# Allegro board SATROT-2-POWERBOARD-5.brd
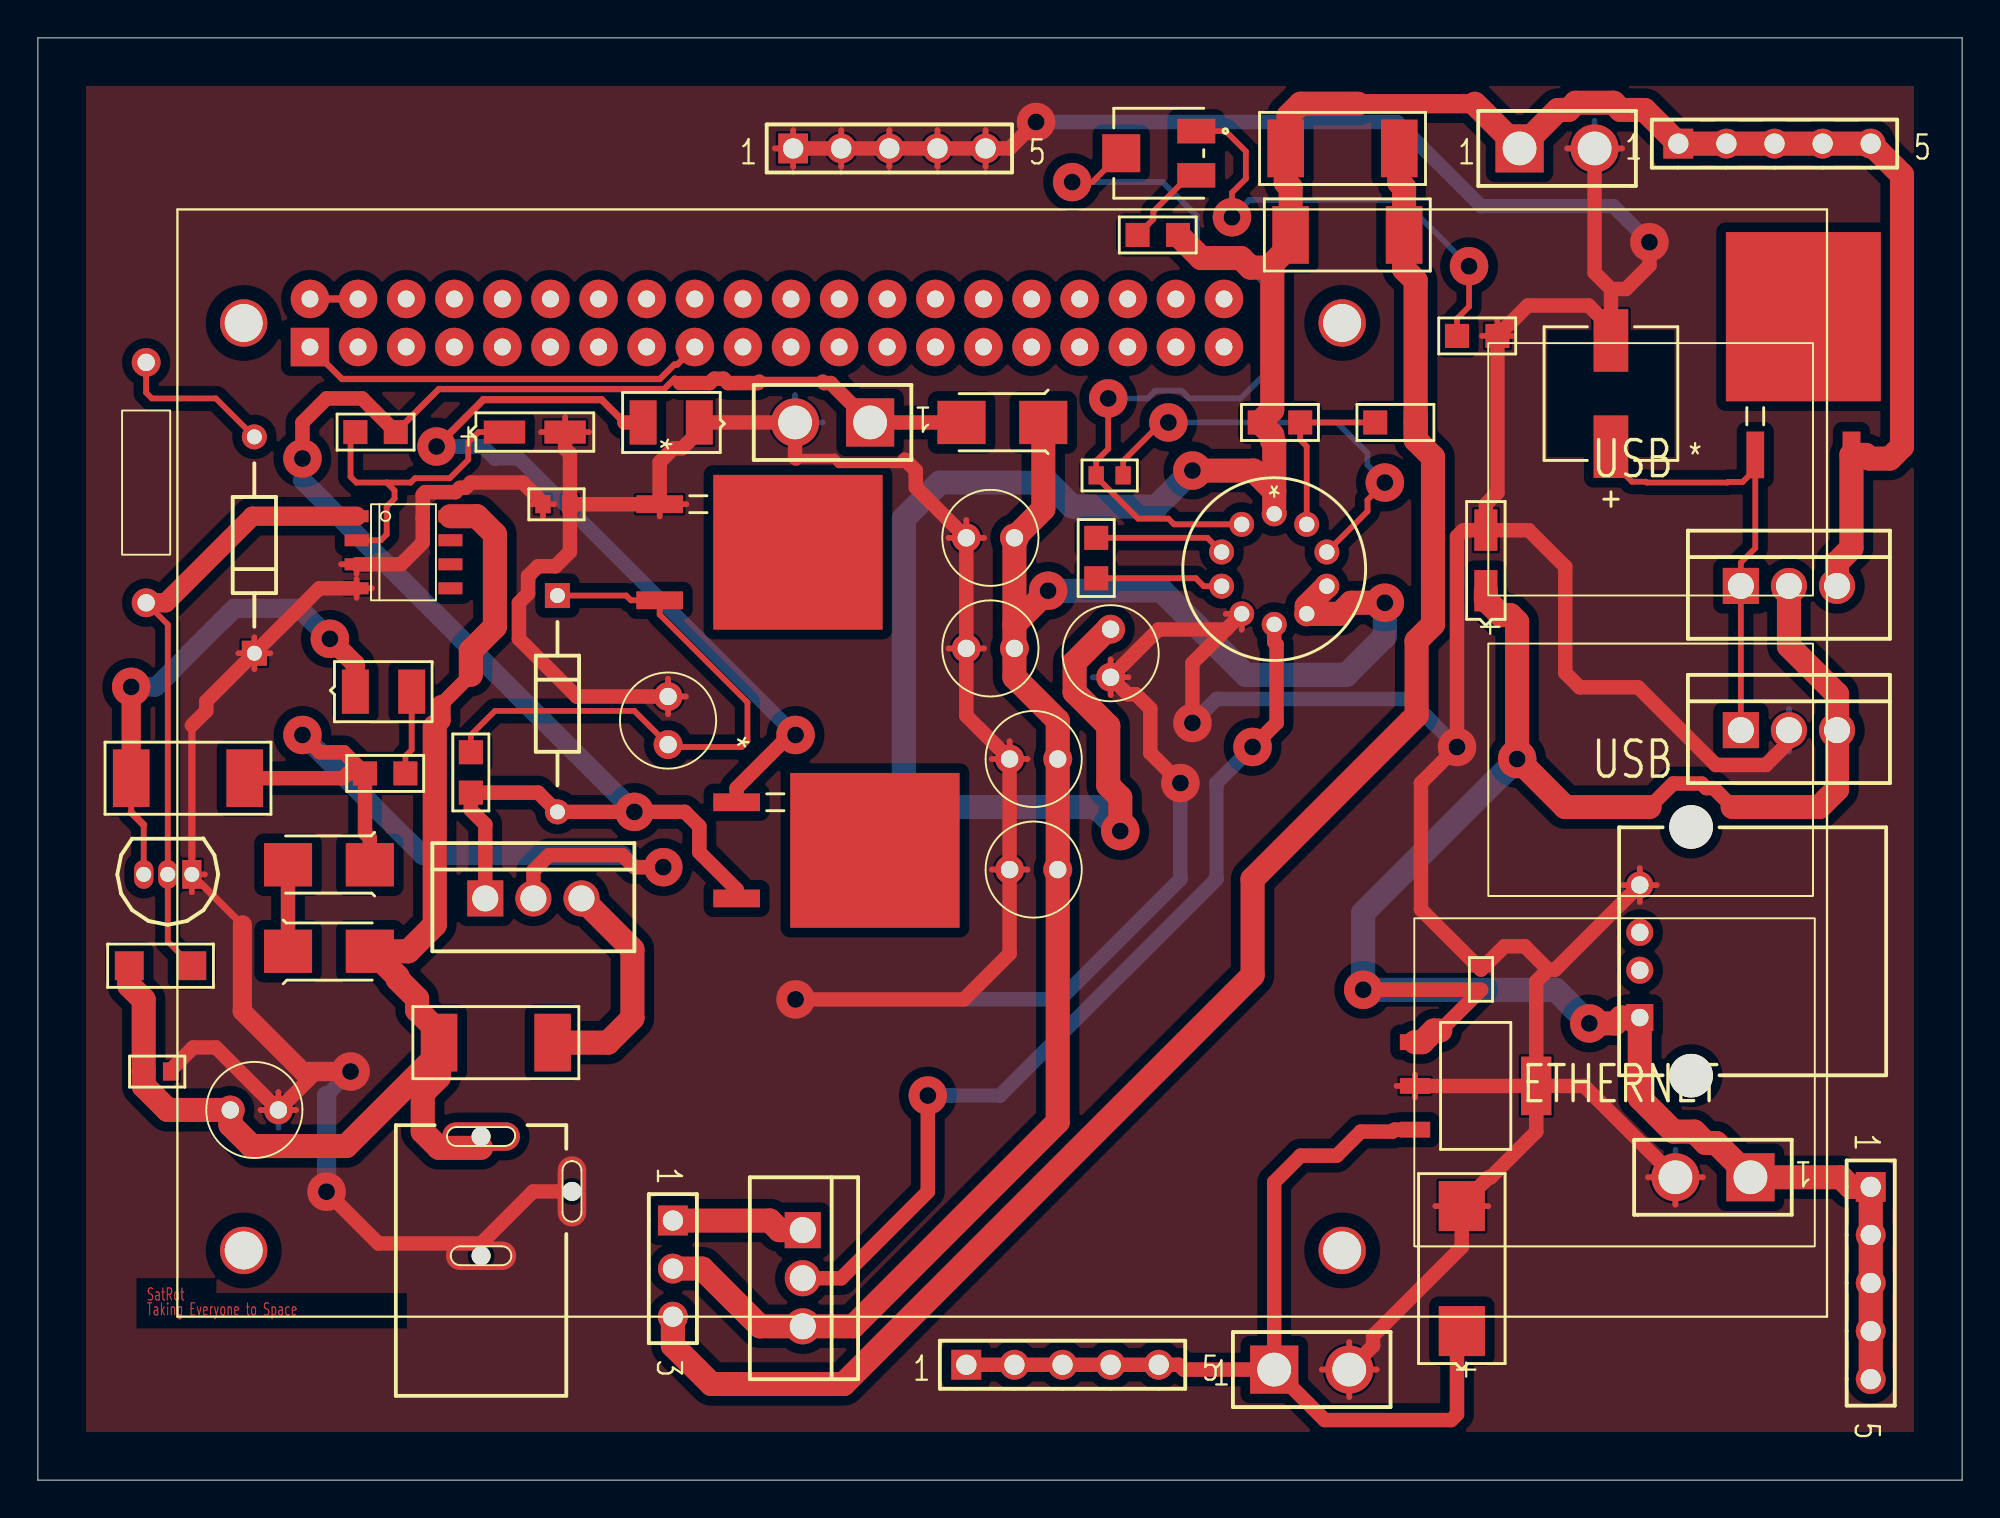
[diagram p0: board, top side]
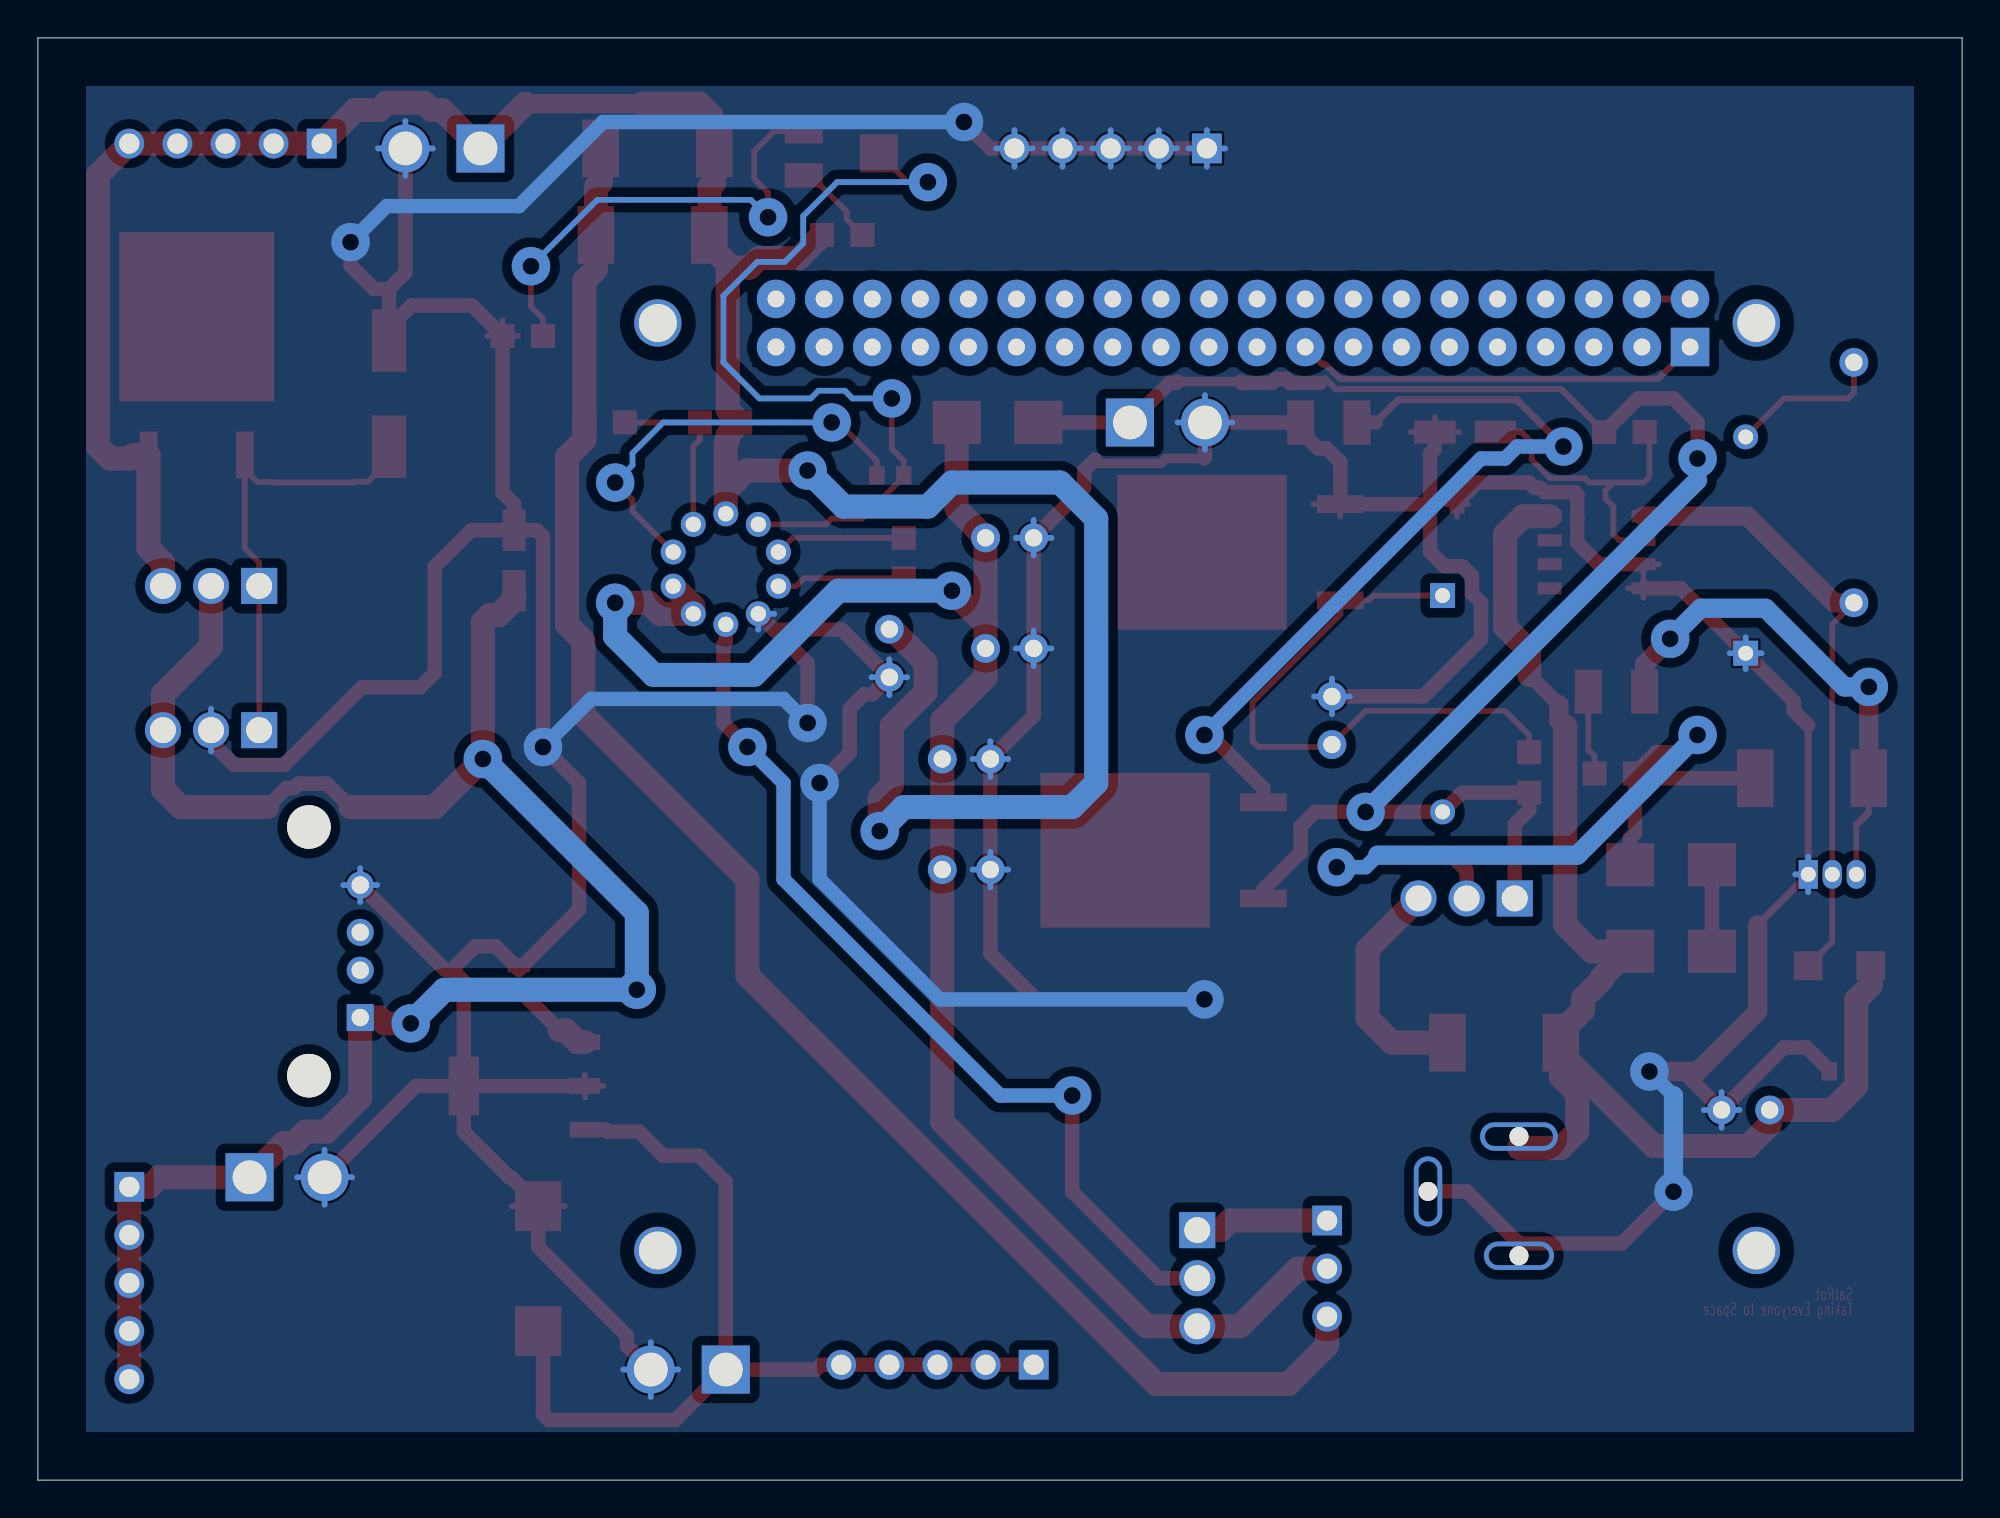
[diagram p1: board, bottom side, seen from below]

Outline 101.6 x 76.2 mm; copper layers: TOP, BOTTOM. Coordinates in mm from the lower left corner of the outline.
Outline path: 0,76.2 101.6,76.2 101.6,0 0,0 0,76.2

## Design rules (mm)
constraint set DEFAULT: min track width 0.305

## Placement (name value [footprint] x y rotation side)
C14  1000uF, 25V  [CAP196]  10.16 19.56 270 top
C15  0.1 uF  [SMC0603]  5.59 21.59 0 top
C16  0.1 uF  [SMC0603]  26.67 51.56 0 top
C17  1uF, 50V  [SMCT321612]  24.64 55.37 0 top
C18  1000uF, 25V  [CAP196]  33.27 38.86 0 top
C19  4700uF, 35V  [CAP196]  51.56 49.78 90 top
C20  4700uF, 35V  [CAP196]  51.56 43.94 90 top
C21  4700uF, 35V  [CAP196]  53.85 38.1 90 top
C22  4700uF, 35V  [CAP196]  53.85 32.26 90 top
C23  1000uF, 25V  [CAP196]  56.64 44.96 180 top
C24  100 pF  [SMC0603]  55.88 53.09 0 top
C25  100uF  [PCAP_SVP_C6-M]  83.06 57.4 90 top
C26  0.1 uF  [SMCT321612]  76.45 46.99 90 top
C27  33 uF  [SMCT734312]  75.18 7.87 90 top
C28  100nF/0.1uF  [SMC0402]  76.2 25.91 90 top
D1  1N4007  [SMDO214AC12]  17.53 32.51 180 top
D2  1N4007  [SMDO214AC12]  13.21 27.94 0 top
D3  LED red  [SMD120612]  16.76 41.66 0 top
D4  1N4148  [DAX1DO204AH]  11.43 43.69 90 top
D5  1N4148  [DAX1DO204AH]  27.43 46.74 270 top
D6  LED green  [SMD120612]  34.92 55.88 180 top
D8  1N4007  [SMDO214AC12]  53.09 55.88 180 top
J11  To batteries  [BLKCON156VHTM1SQSW1562]  43.94 55.88 180 top
J12  12V out  [BLKCON156VHTM1SQSW1562]  78.23 70.36 0 top
J13  5V out  [BLKCON156VHTM1SQSW1562]  90.42 16 180 top
J14  3V3 out  [BLKCON156VHTM1SQSW1562]  65.28 5.84 0 top
J16  DCJ200-10-A-XX-X_REVA  [GCT_DCJ200-10-A-XX-X_REVA]  25.4 14.61 0 top
J17  12V pin out  [BLKCON100VHTM1SQSW1005]  86.61 70.61 0 top
J18  5V pin out  [BLKCON100VHTM1SQSW1005]  96.77 15.49 270 top
J19  3V3 pin out  [BLKCON100VHTM1SQSW1005]  49.02 6.1 0 top
J20  GND  [BLKCON100VHTM1SQSW1005]  39.88 70.36 0 top
J21  CON3  [BLKCON100VHTM1SQSW1003]  33.53 13.72 270 top
P1  USB-A1HSW6  [OST_USB-A1HSW6]  85.09 27.94 90 top
Q1  BC327  [TO92]  8.13 32 180 top
Q3  MJE2955  [TO220AB]  23.62 30.73 0 top
Q4  3055T  [TO220AB]  40.39 13.21 270 top
Q7  MJE2955  [TO220AB]  89.92 47.24 0 top
R26  10K  [SMR1206]  4.83 27.18 0 top
R27  1M  [RES500]  5.71 59.05 0 top
R28  470  [SMR0805]  17.27 37.34 0 top
R29  150, 2W  [SMR2512]  10.92 37.08 180 top
R30  100K  [SMR0805]  22.86 36.32 90 top
R31  1K  [BO_PWR163]  40.13 49.02 270 top
R32  100K  [SMR0805]  16.76 55.37 0 top
R33  1K  [BO_PWR163]  44.2 33.27 270 top
R34  1, 2W  [SMR2512]  27.18 23.11 180 top
R37  680  [SMR0805]  64.52 55.88 0 top
R39  0.15, 10W  [SMR2512]  72.14 65.79 180 top
R40  0.15, 10W  [SMR2512]  71.88 70.36 180 top
R41  2.7K  [SMR0805]  60.2 65.79 180 top
R42  3.3K  [SMR0805]  74.93 60.45 0 top
R43  1K POT  [POT_3314J]  59.18 70.1 90 top
R44  1.5K  [SMR0805]  55.88 49.78 270 top
R45  270  [SMR0805]  70.61 55.88 0 top
R46  33, 5W  [BO_PWR163]  93.22 61.47 0 top
U4  TL072  [SOIC8]  19.3 49.02 0 top
U5  LM723CHNOPB  [H10C]  65.28 51.05 180 top
U6  LM7805C/TO220  [TO220AB]  89.92 39.62 0 top
U7  LM3940IMP-33  [SOT230P696X180-4N]  73.91 20.83 0 top
U9  Raspberry Pi B+  [GU-RASP-PI-3]  7.37 8.64 0 top

## Library data of the parts
C14 C18-C23 = CAP POL: Tolerance: ***; User Part Number: ***
C15 C16 C24 C28 = CAP NP
C17 C26 C27 = CAP POL
C25 = CAP POL: User Part Number: PN; Tolerance: TOL
D1 D2 D4 D5 D8 = DIODE
D3 D6 = LED
J11 = CON2
J12-J14 = HEADER 2
J16 = DCJ200-10-A-XX-X_REVA
J17-J20 = CON5
J21 = CON3
P1 = USB-A1HSW6
Q1 Q3 = BC327
Q4 = BC337
Q7 = MJE2955
R26 R28-R30 R32 R34 R37 R39-R42 R44 R45 = R
R27 = R: Tolerance: ***; User Part Number: ***
R31 R33 R46 = PWR163S-25-15R0F: User Part Number: PN; Tolerance: TOL
R43 = 3314J-2-203E: User Part Number: PN; Tolerance: TOL
U4 = TL072: Tolerance: ***; User Part Number: ***
U5 = LM723CHNOPB: User Part Number: PN; Tolerance: TOL
U6 = LM7805C/TO220_0
U7 = LM3940IMP-33
U9 = Raspberry Pi B+

## Footprints (pads in the part's own frame, mm; a bottom-side part is the same pattern mirrored in y, then rotated)
BLKCON100VHTM1SQSW1003
  rect 1.575x1.575 hole 1.067: 1(0,0)
  round 1.575 hole 1.067: 2(2.54,0) 3(5.08,0)
BLKCON100VHTM1SQSW1005
  rect 1.575x1.575 hole 1.067: 1(0,0)
  round 1.575 hole 1.067: 2(2.54,0) 3(5.08,0) 4(7.62,0) 5(10.16,0)
BLKCON156VHTM1SQSW1562
  rect 2.54x2.54 hole 1.778: 1(0,0)
  round 2.54 hole 1.778: 2(3.962,0)
BO_PWR163
  rect 0.94x2.464 smd: 1(-2.54,-7.303) 2(2.54,-7.303)
  rect 8.179x8.941 smd: 3(0,0)
CAP196
  round 1.524 hole 0.914: 1(0,0) 2(0,2.54)
DAX1DO204AH
  rect 1.321x1.321 hole 0.787: 1(0,0)
  round 1.321 hole 0.787: 2(11.43,0)
GCT_DCJ200-10-A-XX-X_REVA
  round 1 hole 1 unplated: (-2,3.55) (-2,-2.75) (2.8,0.65)
  rect 0.1x0.1 smd: 1(-2,2.95) 2(-2,-2.1) 3(2.2,0.65)
GU-RASP-PI-3
  round 2.5 hole 2 unplated: (3.5,52.5) (3.5,3.5) (61.5,52.5) (61.5,3.5)
  rect 2.032x2.032 hole 0.889: 1(7,51.23)
  round 2.032 hole 0.889: 2(7,53.77) 3(9.54,51.23) 4(9.54,53.77) 5(12.08,51.23) 6(12.08,53.77) 7(14.62,51.23) 8(14.62,53.77) 9(17.16,51.23) 10(17.16,53.77) 11(19.7,51.23) 12(19.7,53.77) 13(22.24,51.23) 14(22.24,53.77) 15(24.78,51.23) 16(24.78,53.77) 17(27.32,51.23) 18(27.32,53.77) 19(29.86,51.23) 20(29.86,53.77) 21(32.4,51.23) 22(32.4,53.77) 23(34.94,51.23) 24(34.94,53.77) 25(37.48,51.23) 26(37.48,53.77) 27(40.02,51.23) 28(40.02,53.77) 29(42.56,51.23) 30(42.56,53.77) 31(45.1,51.23) 32(45.1,53.77) 33(47.64,51.23) 34(47.64,53.77) 35(50.18,51.23) 36(50.18,53.77) 37(52.72,51.23) 38(52.72,53.77) 39(55.26,51.23) 40(55.26,53.77)
H10C
  round 1.321 hole 0.813: 1(0,0) 2(1.717,0.558) 3(2.778,2.018) 4(2.778,3.824) 5(1.717,5.284) 6(0,5.842) 7(-1.717,5.284) 8(-2.778,3.824) 9(-2.778,2.018) 10(-1.717,0.558)
OST_USB-A1HSW6
  round 2.3 hole 2.3 unplated: (-6.57,-2.2) (6.57,-2.2)
  rect 1.428x1.428 hole 0.92: 1(-3.5,0.51)
  round 1.428 hole 0.92: 2(-1,0.51) 3(1,0.51) 4(3.5,0.51)
PCAP_SVP_C6-M
  rect 3.302x1.829 smd: 1(-2.807,0) 2(2.807,0)
POT_3314J
  rect 1.295x2.007 smd: 1(-1.168,-1.981) 3(1.168,-1.981)
  rect 2.007x2.007 smd: 2(0,1.981)
RES500
  round 1.524 hole 0.914: 1(0,-12.7) 2(0,0)
SMC0402
  rect 0.559x0.559 smd: 1(0,0) 2(1.067,0)
SMC0603
  rect 0.813x0.965 smd: 1(0,0) 2(1.422,0)
SMCT321612
  rect 2.184x1.219 smd: 1(0,0) 2(3.2,0)
SMCT734312
  rect 2.642x2.438 smd: 1(0,0) 2(6.604,0)
SMD120612
  rect 1.422x2.337 smd: 1(0,0) 2(2.972,0)
SMDO214AC12
  rect 2.54x2.286 smd: 1(0,0) 2(4.318,0)
SMR0805
  rect 1.27x1.27 smd: 1(0,0) 2(2.134,0)
SMR1206
  rect 1.524x1.524 smd: 1(0,0) 2(3.302,0)
SMR2512
  rect 1.93x3.048 smd: 1(0,0) 2(5.994,0)
SOIC8
  rect 1.27x0.635 smd: 1(-2.477,1.905) 2(-2.477,0.635) 3(-2.477,-0.635) 4(-2.477,-1.905) 5(2.477,-1.905) 6(2.477,-0.635) 7(2.477,0.635) 8(2.477,1.905)
SOT230P696X180-4N
  rect 1.6x0.838 smd: 1(-1.2,2.311) 2(-1.2,0) 3(-1.2,-2.311)
  rect 1.6x3.099 smd: 4(5.2,0)
TO92
  rect 1.016x1.524 hole 0.787: 1(0,0)
  oval 1.016x1.524 hole 0.787: 2(1.27,0) 3(2.54,0)
TO220AB
  rect 1.905x1.905 hole 1.372: 1(0,0)
  round 1.905 hole 1.372: 2(2.54,0) 3(5.08,0)

## Nets
GND1: U9.6
GND3: U9.14
GND4: U9.20
GND5: U9.25
GND6: U9.30
GND7: U9.34
GND8: U9.39
GND_POWER: C14.2 C15.2 C16.1 C16.2 C17.2 C18.2 C19.2 C20.2 C21.2 C22.2 C23.2 C25.2 C26.2 C27.2 C28.2 D4.1(K) D6.1(CATHODE) J11.2 J12.2 J13.2 J14.2 J16.2 J16.3 J20.1 J20.2 J20.3 J20.4 J20.5 P1.4 Q1.1 R31.1 R42.2 U4.3 U4.4 U5.5 U6.2 U7.2 U7.4
P3V3: U9.1 U9.17
P5V: U9.2 U9.4(P5V#4)
N12978: C14.1 C15.1 D2.2 J16.1 R26.1 R34.2 U4.8
N13089: D1.2 D2.1(K)
N13093: D1.1(K) Q3.2 R28.1 R29.1
N13141: D3.1(CATHODE) Q1.3(EMITTER) R29.2
N13166: Q1.2 R26.2 R27.1 U4.1
N13277: C18.1 D5.1(K) R30.2 R31.2
N13315: D5.2 D8.2 J11.1 Q3.1 R30.1 R32.2 R33.2
N13493: C17.1 R32.1 U4.2
N13497: D6.2 R33.1
N14459: C19.1 C20.1 C21.1 C22.1 D8.1(K) J21.2 Q4.3 U5.7 U5.8
N15485: Q4.2 U5.6
N15944: C24.1 R43.2 U5.2
N16055: C23.1 J12.1 J17.1 J17.2 J17.3 J17.4 J17.5 Q7.3(E) R37.1 R39.2 R40.2 R41.1 R46.2 U5.1
N16330: J21.3 R39.1 R40.1 R45.2
N17495: C25.1 Q7.1 R46.1 U6.1
N17520: C26.1 C28.1 J13.1 J18.1 J18.2 J18.3 J18.4 J18.5 P1.1(VBUS) Q7.2 U6.3(OUT) U7.1
N19133: C27.1 J14.1 J19.1 J19.2 J19.3 J19.4 J19.5 U7.3(OUT)
N42082: R44.1 U5.3
N42091: R44.2 U5.4(VREF)
N42683: C24.2 U5.9
N43227: R37.2 R45.1 U5.10
N47835: J21.1 Q4.1(EMITTER)
N359981: R41.2 R43.1
N360181: D4.2 R27.2
N360980: R42.1 R43.3
N362820: D3.2 R28.2
N366460: Q3.3(EMITTER) R34.1

Pads without a net: P1 2 3; R31 3; R33 3; R46 3; U4 5 6 7; U9 3 5 7 8 9 10 11 12 13 15 16 18 19 21 22 23 24 26 27 28 29 31 32 33 35 36 37 38 40

## Via types
v1: diameter 2.032, hole 0.889, TOP to BOTTOM, 31 vias

## Routing (per net, layer and track width the routed paths; a pad name or vN(x,y) marks a point on that pad's centre or on a via; arc(x,y) is an arc through that point)
GND_POWER: length 569.6
  TOP w0.305: 56.64,41.48 C23.2 ; C23.2 56.64,43.36 ; C23.2 57.58,42.42 ; 72.71,20.23 U7.2 ; U7.2 71.74,20.83 ; U7.2 72.71,21.43 ; R42.2 77.06,61.27 ; R42.2 76.25,60.45 ; R42.2 77.88,60.45 ; C18.2 33.27,42.34 ; C18.2 34.21,41.4 ; C18.2 33.27,40.46 ; U4.4 16.83,47.61 ; U4.4 17.64,47.12 ; U4.4 16.83,46.62 ; C28.2 76.2,27.43 ; C28.2 76.66,26.97 ; C28.2 75.74,26.97 ; 48.08,49.78 C19.2 ; C19.2 49.02,50.72 ; C19.2 49.96,49.78 ; 83.69,31.44 P1.4 ; P1.4 84.58,30.55 ; P1.4 84.58,32.33 ; P1.4 85.47,31.44 ; 44.96,69.39 J20.3 44.96,71.32 ; 32.83,50.91 R31.1 34.24,51.56 ; 86.46,14.55 J13.2 ; J13.2 85.01,16 ; J13.2 87.91,16 ; D4.1 11.43,44.53 ; D4.1 12.27,43.69 ; D4.1 10.59,43.69 ; D4.1 11.43,42.85 ; 50.04,71.32 J20.5 50.04,69.39 ; 38.91,70.36 J20.1 ; J20.1 39.88,69.39 ; J20.1 39.88,71.32 ; 48.08,43.94 C20.2 49.96,43.94 ; 16.01,48.39 U4.3 16.83,47.89 ; C17.2 27.84,56.16 ; C17.2 26.57,55.37 ; C17.2 29.11,55.37 ; J14.2 70.69,5.84 ; J14.2 69.24,4.39 ; J14.2 69.24,7.29 ; J14.2 67.79,5.84 ; 11.76,19.56 C14.2 ; C14.2 13.64,19.56 ; C14.2 12.7,20.5 ; 80.75,70.36 J12.2 83.64,70.36 ; 62.72,45.77 U5.5 63.56,44.93 ; 50.37,32.26 C22.2 52.25,32.26 ; C21.2 51.31,39.04 ; C21.2 52.25,38.1 ; C21.2 50.37,38.1 ; 42.42,71.32 J20.2 42.42,69.39 ; C16.1 27.25,51.56 ; C16.1 26.67,50.9 ; C16.1 26.09,51.56 ; 47.5,71.32 J20.4 47.5,69.39 ; 76.58,14.48 C27.2 73.79,14.48 ; 8.81,32 Q1.1 8.13,31.06
  TOP w0.381: 8.13,39.88 Q1.1 10.79,29.34
  TOP w0.508: 45.78,53.92 45.58,53.72 42.3,53.72 42.05,53.98 40.03,53.98
  TOP w0.762: U4.4 14.86,47.12 D4.1 8.89,41.15 8.89,40.64 8.13,39.88 ; 62.73,44.94 59.17,44.94 C23.2 57.54,41.52 57.98,41.52 58.74,40.76 58.74,38.42 v1(60.33,36.83) ; 62.73,44.94 60.96,43.17 v1(60.96,40.01) ; 62.73,44.94 U5.5 ; 83.06,62.93 83.85,62.93 85.09,64.17 v1(85.09,65.41) ; 83.06,62.93 82.19,63.79 J12.2 ; 83.06,62.93 83.06,60.95 ; 40.03,53.98 39.98,54.03 J11.2 D6.1 34.92,55.42 34.02,54.51 33.56,54.51 32.83,53.78 R31.1 C16.2 ; U7.4 U7.2 ; U7.4 79.11,18.41 76.7,16 76.6,16 75.18,14.58 C27.2 75.18,12.32 70.5,7.63 70.5,7.1 J14.2 ; U7.4 81.64,20.83 J13.2 ; U7.4 79.11,26.35 79.74,26.97 ; v1(15.24,15.24) 17.98,12.5 J16.2 26.15,15.25 J16.3 ; 79.74,26.97 80.11,26.97 P1.4 ; 79.74,26.97 78.51,28.21 77.43,28.21 C28.2 73.03,30.15 73.03,36.83 v1(74.93,38.73) 74.93,49.86 75.23,50.16 75.31,50.16 75.34,50.19 C26.2 ; C26.2 76.45,51.56 77.06,52.17 R42.2 78.67,62.06 81.88,62.06 82.69,61.25 82.75,61.25 83.06,60.95 ; C26.2 78.71,50.19 80.64,48.26 80.64,42.65 81.41,41.89 84.49,41.89 88.6,37.78 91.24,37.78 92.46,39 U6.2 ; C16.2 28.09,49.05 27.33,48.29 26.4,48.29 25.88,47.76 25.88,46.84 25.4,46.35 25.4,44.45 28.45,41.4 C18.2 ; C16.2 28.09,54.23 27.84,54.48 C17.2 ; 83.06,60.95 C25.2 ; C15.2 7.01,21.67 8.2,22.86 9.4,22.86 C14.2 14.73,21.59 ; U4.3 19.18,48.39 20.32,49.53 20.32,50.8 20.32,50.8 20.32,52.07 20.45,52.2 22.05,52.2 22.28,52.43 22.58,52.43 22.86,52.7 25.6,52.7 26.67,51.64 C16.1 ; 45.78,53.92 46.35,53.34 46.35,52.45 C19.2 C20.2 49.02,40.39 C21.2 C22.2 51.31,27.81 48.9,25.4 v1(40.01,25.4) ; J20.1 J20.2 J20.3 J20.4 J20.5 51.31,70.36 v1(52.7,71.75)
  TOP w1.016: v1(16.51,21.59) 13.97,21.59 10.79,24.77 10.79,29.34
  BOTTOM w0.305: J20.2 43.38,70.36 ; J20.2 42.42,69.39 ; J20.2 42.42,71.32 ; J20.2 41.45,70.36 ; 69.24,4.39 J14.2 ; J14.2 67.79,5.84 ; J14.2 69.24,7.29 ; J14.2 70.69,5.84 ; C23.2 56.64,43.36 ; C23.2 55.7,42.42 ; C23.2 57.58,42.42 ; C23.2 56.64,41.48 ; 50.04,69.39 J20.5 ; J20.5 51,70.36 ; J20.5 50.04,71.32 ; J20.5 49.07,70.36 ; J12.2 83.64,70.36 ; J12.2 82.19,71.81 ; J12.2 82.19,68.91 ; J12.2 80.75,70.36 ; C18.2 33.27,42.34 ; C18.2 32.33,41.4 ; C18.2 33.27,40.46 ; C18.2 34.21,41.4 ; 10.59,43.69 D4.1 ; D4.1 12.27,43.69 ; D4.1 11.43,44.53 ; D4.1 11.43,42.85 ; P1.4 85.47,31.44 ; P1.4 83.69,31.44 ; P1.4 84.58,32.33 ; P1.4 84.58,30.55 ; J20.4 48.46,70.36 ; J20.4 47.5,69.39 ; J20.4 46.53,70.36 ; J20.4 47.5,71.32 ; 12.7,18.62 C14.2 ; C14.2 13.64,19.56 ; C14.2 12.7,20.5 ; C14.2 11.76,19.56 ; C22.2 51.31,33.2 ; C22.2 51.31,31.32 ; C22.2 52.25,32.26 ; C22.2 50.37,32.26 ; C19.2 49.02,50.72 ; C19.2 49.96,49.78 ; C19.2 49.02,48.84 ; C19.2 48.08,49.78 ; 38.91,70.36 J20.1 ; J20.1 40.84,70.36 ; J20.1 39.88,69.39 ; J20.1 39.88,71.32 ; 48.08,43.94 C20.2 ; C20.2 49.96,43.94 ; C20.2 49.02,43 ; C20.2 49.02,44.88 ; Q1.1 8.13,32.94 ; Q1.1 8.81,32 ; Q1.1 8.13,31.06 ; 50.37,38.1 C21.2 ; C21.2 51.31,39.04 ; C21.2 52.25,38.1 ; C21.2 51.31,37.16 ; 38.53,55.88 J11.2 ; J11.2 41.43,55.88 ; J11.2 39.98,57.33 ; J11.2 39.98,54.43 ; J20.3 45.92,70.36 ; J20.3 44.96,69.39 ; J20.3 44.96,71.32 ; J20.3 43.99,70.36 ; 86.46,14.55 J13.2 ; J13.2 86.46,17.45 ; J13.2 87.91,16 ; J13.2 85.01,16 ; 92.46,38.49 U6.2 92.46,40.75 ; 63.56,44.93 U5.5 62.72,45.77
  BOTTOM w0.762: v1(74.93,38.73) 72.39,41.27 62.23,41.27 v1(60.96,40.01) ; v1(40.01,25.4) 53.98,25.4 60.33,31.75 v1(60.33,36.83) ; 15.24,20.32 v1(16.51,21.59) ; v1(52.7,71.75) 71.75,71.75 76.2,67.31 83.19,67.31 v1(85.09,65.41)
  BOTTOM w1.016: v1(15.24,15.24) 15.24,20.32
P3V3: length 21.7
  TOP w0.33: U9.1 16.06,58.18 32.85,58.18 33.61,58.94 33.76,58.94 U9.17
P5V: length 2.5
  TOP w0.381: U9.2 U9.4
N12978: length 69.6
  TOP w0.762: 22.86,42.55 21.29,40.97
  TOP w1.016: 21.29,40.97 21.29,40.14 20.95,39.81
  TOP w1.27: 21.18,22.56 R34.2 21.18,23.67 20.02,24.84 20.02,25.45 18.99,26.47 18.99,26.6 17.65,27.94 ; 21.18,22.56 16.28,17.65 11.28,17.65 10.17,18.77 10.17,19.55 C14.1 6.86,19.56 5.59,20.83 C15.1 5.59,25.37 4.83,26.14 R26.1 ; 21.18,22.56 21.18,21.31 20.32,20.45 20.32,18.41 21.18,17.55 J16.1 ; 20.95,39.81 20.95,29.34 19.56,27.94 17.65,27.94 ; 17.65,27.94 D2.2 ; 22.86,42.55 22.86,43.81 24.13,45.09 24.13,49.97 23.18,50.93 U4.8
N13089: length 4.6
  TOP w0.762: D2.1 D1.2
N13093: length 46.4
  TOP w0.762: R29.1 16.1,37.08 16.36,37.34 R28.1 ; R28.1 16.16,38.45 14.89,38.45 v1(13.97,39.37) ; R28.1 17.27,34.19 17.53,33.93 D1.1 ; Q3.2 26.16,32.19 26.99,33.02 30.86,33.02 31.5,32.38 v1(33.02,32.38)
  BOTTOM w0.762: v1(33.02,32.38) 31.5,32.38 30.86,33.02
  BOTTOM w1.016: 30.86,33.02 20.32,33.02 v1(13.97,39.37)
N13141: length 26.4
  TOP w0.305: 4.93,35.28 R29.2 ; Q1.3 5.59,34.62
  TOP w0.381: 5.59,34.62 4.93,35.28
  TOP w1.016: v1(15.42,44.45) 16.76,43.1 D3.1 ; v1(4.93,41.91) R29.2
  BOTTOM w1.016: v1(15.42,44.45) 13.8,46.06 10.38,46.06 6.22,41.91 v1(4.93,41.91)
N13166: length 33.2
  TOP w0.305: R27.1 6.86,45.21 Q1.2 6.86,28.45 R26.2
  TOP w1.016: U4.1 11.33,50.93 6.76,46.35 R27.1
N13277: length 31.8
  TOP w0.305: R30.2 22.86,39.37 24.13,40.64 31.5,40.64 C18.1 33.4,38.73 37.16,38.73 37.47,39.04 37.47,41.1 32.83,45.73 R31.2 31.32,46.48 31.06,46.74 D5.1
N13315: length 89.6
  TOP w0.33: R32.2 21.17,57.64 33.07,57.64 33.61,58.19 33.67,58.19 33.9,57.96
  TOP w0.508: 41.44,58.04 38.09,58.04
  TOP w0.762: D8.2 J11.1 41.86,57.96 41.52,57.96 41.44,58.04 ; v1(13.97,53.98) 13.97,55.88 15.24,57.15 17.12,57.15 R32.2 ; R33.2 36.89,31.2 34.92,33.17 34.92,34.54 34.16,35.31 v1(31.5,35.31) D5.2 26.42,36.32 R30.1 22.86,35.41 23.62,34.65 Q3.1 ; 33.9,57.96 35.48,57.96 35.7,58.19 36.21,58.19 36.44,57.96 38.02,57.96 38.09,58.04
  BOTTOM w0.762: 13.97,52.83 v1(13.97,53.98)
  BOTTOM w1.016: v1(31.5,35.31) 13.97,52.83
N13493: length 17.2
  TOP w0.305: 18.41,52.7 16.81,52.7 16.51,53.01 16.51,55.12 R32.1 ; 18.41,52.7 18.83,52.29 18.83,51.85 18.41,51.44 18.41,49.96 18.11,49.66 U4.2 ; 18.41,52.7 19.68,52.7 19.91,52.93 21.75,52.93 22.73,53.92 22.73,54.83 23.27,55.37 C17.1
N13497: length 42.7
  TOP w0.381: 30.96,55.88 29.76,57.08 23.53,57.08 v1(21.05,54.61)
  TOP w0.762: v1(40.01,39.37) 39.7,39.37 36.89,36.56 R33.1 ; 30.96,55.88 D6.2
  BOTTOM w0.762: v1(40.01,39.37) 25.4,53.98 24.13,53.98 23.5,54.61 v1(21.05,54.61)
N14459: length 95.6
  TOP w1.27: U5.8 67,46.17 U5.7 68.76,45.77 69.34,46.35 v1(71.12,46.35) ; 51.56,45.21 C20.1 51.56,42.42 53.85,40.13 C21.1 C22.1 53.85,18.92 43.05,8.13 Q4.3 38.13,8.13 35.08,11.18 J21.2 ; 51.56,45.21 C19.1 53.09,51.31 D8.1 ; 51.56,45.21 v1(53.34,46.99)
  BOTTOM w1.27: v1(53.34,46.99) 59.34,46.99 63.79,42.55 69.09,42.55 71.12,44.58 v1(71.12,46.35)
N15485: length 48.4
  TOP w0.762: v1(64.14,38.73) 65.41,40.01 65.41,44.15 65.28,44.27 U5.6 ; Q4.2 42.42,10.67 46.99,15.24 v1(46.99,20.32)
  BOTTOM w0.762: v1(46.99,20.32) 50.8,20.32 62.23,31.75 62.23,36.83 v1(64.14,38.73)
N15944: length 44
  TOP w0.305: v1(56.52,57.15) 56.52,54.48 55.88,53.85 C24.1 55.88,53.01 58.09,50.8 59.69,50.8 59.99,50.5 U5.2 ; v1(54.61,68.58) 55.68,68.58 R43.2
  BOTTOM w0.305: v1(54.61,68.58) 59.4,68.58 61.19,66.79 61.19,65.35 62.17,64.36 63.61,64.36 65.41,62.57 65.41,59.05 63.5,57.15 60.79,57.15 60.38,57.56 59,57.56 58.59,57.15 v1(56.52,57.15)
N16055: length 149.8
  TOP w1.016: 75.87,72.72 69.71,72.72
  TOP w1.27: 64.98,64.06 64.02,64.06 63.52,64.57 61.42,64.57 R41.1 ; 64.98,64.06 65.18,63.87 65.18,56.54 R37.1 65.18,55.22 65.18,54.9 65.28,54.8 65.28,52.25 ; 64.98,64.06 66.14,65.23 R39.2 66.14,68.3 65.89,68.55 R40.2 66.04,70.51 66.04,72.09 66.67,72.72 69.71,72.72 ; C23.1 56.49,44.96 54.74,43.21 54.74,41.63 56.52,39.85 56.52,36.7 57.15,36.07 v1(57.15,34.29) ; v1(60.96,53.34) 64.19,53.34 65.28,52.25 ; 75.87,72.72 J12.1 80.26,72.39 80.81,72.39 81.19,72.77 83.19,72.77 83.58,72.39 84.84,72.39 J17.1 J17.2 J17.3 J17.4 J17.5 98.42,68.96 98.42,54.61 97.79,53.98 96.7,53.98 96.51,54.17 R46.2 95.76,49.24 95,48.48 Q7.3 ; U5.1 65.28,52.25
  BOTTOM w1.27: v1(60.96,53.34) 59.05,51.44 54.61,51.44 53.34,52.7 47.62,52.7 45.72,50.8 45.72,36.83 46.99,35.56 55.88,35.56 v1(57.15,34.29)
N16330: length 90.3
  TOP w1.27: R40.1 71.88,68.55 72.14,68.3 R39.1 72.14,63.98 72.75,63.37 R45.2 72.75,54.97 73.66,54.05 73.66,45.21 72.8,44.34 72.8,40.41 64.14,31.75 64.14,26.67 42.55,5.08 35.56,5.08 33.53,7.11 J21.3
N17495: length 24
  TOP w0.305: U6.1 Q7.1 89.92,48.48 90.68,49.24 90.68,53.4 ; 90.68,53.4 90.01,52.74 89.25,52.74 89.22,52.7 84.95,52.7 84.91,52.75 84.17,52.75 83.06,53.86 C25.1 ; 90.68,53.4 R46.1
N17520: length 111.4
  TOP w0.762: 85.1,35.56 86.34,36.8 87.85,36.8 88.09,36.56 88.48,36.56 89.48,35.56 ; 74.05,23.76 C28.1 v1(69.98,25.91)
  TOP w1.27: Q7.2 92.46,44.07 95,41.53 U6.3 95,36.5 94.06,35.56 89.48,35.56 ; U7.1 73.09,23.14 73.71,23.76 74.05,23.76 ; v1(81.92,24.13) 83.28,24.13 83.59,24.44 P1.1 84.58,20.2 86.36,18.41 87.46,18.41 88.07,17.81 88.62,17.81 J13.1 95.2,16 95.71,15.49 J18.1 J18.2 J18.3 J18.4 J18.5 ; 85.1,35.56 80.64,35.56 v1(78.11,38.1) 78.11,45.34 77.74,45.7 77.26,45.7 76.45,46.51 C26.1
  BOTTOM w1.27: v1(78.11,38.1) 69.98,29.97 v1(69.98,25.91) 80.14,25.91 v1(81.92,24.13)
N19133: length 50.2
  TOP w0.762: J19.1 J19.2 J19.3 J19.4 J19.5 60.25,6.1 60.5,5.84 J14.1 ; U7.3 71.63,18.52 71.53,18.41 69.85,18.41 68.58,17.14 66.67,17.14 65.28,15.75 J14.1 ; J14.1 67.94,3.17 74.63,3.17 74.93,3.48 74.93,7.62 C27.1
N42082: length 6.9
  TOP w0.305: U5.3 61.75,49.78 R44.1
N42091: length 6.8
  TOP w0.305: R44.2 61.14,47.65 61.56,47.23 U5.4
N42683: length 22
  TOP w0.305: U5.9 70.2,51.18 70.2,51.79 v1(71.12,52.7) ; v1(59.69,55.88) 59.33,55.88 57.3,53.85 C24.2
  BOTTOM w0.305: v1(71.12,52.7) 70.2,53.62 70.2,54.26 68.58,55.88 v1(59.69,55.88)
N43227: length 9.5
  TOP w0.305: R45.1 R37.2 66.65,54.97 67,54.62 U5.10
N47835: length 7.1
  TOP w1.27: J21.1 38.65,13.72 39.15,13.21 Q4.1
N359981: length 4.6
  TOP w0.305: R43.1 60.81,68.94 58.9,67.03 58.9,66.62 R41.2
N360181: length 8.3
  TOP w0.305: R27.2 5.71,57.45 6.02,57.15 9.4,57.15 D4.2
N360980: length 25.1
  TOP w0.305: R43.3 62.71,71.27 63.78,70.2 63.78,68.75 63.05,68.02 v1(63.05,66.72) ; v1(75.56,64.14) 75.56,62 74.93,61.37 R42.1
  BOTTOM w0.305: v1(63.05,66.72) 63.96,67.64 72.06,67.64 v1(75.56,64.14)
N362820: length 4.5
  TOP w0.305: D3.2 19.74,38.58 19.41,38.25 R28.2
N366460: length 12.2
  TOP w1.27: R34.1 30.1,23.11 31.39,24.41 31.39,28.05 Q3.3

## Copper pours and planes (outline as drawn; the poured copper is in the pictures)
GND_POWER on TOP, BOTTOM: 2.54,73.66 99.06,73.66 99.06,2.54 2.54,2.54
GND_POWER on TOP (solid shape): 23.4,12.36 22.3,12.36 21.95,12.21 21.8,11.85 21.95,11.5 22.3,11.36 23.4,11.36 23.4,11.1 22.3,11.1 21.77,11.32 21.55,11.85 21.77,12.39 22.3,12.61 23.4,12.61
GND_POWER on TOP (solid shape): 24.5,12.61 25.03,12.39 25.25,11.85 25.03,11.32 24.5,11.1 23.4,11.1 23.4,11.36 24.5,11.36 24.85,11.5 25,11.85 24.85,12.21 24.5,12.36 23.4,12.36 23.4,12.61
GND_POWER on TOP (solid shape): 27.7,14.15 27.85,13.8 28.2,13.66 28.55,13.8 28.7,14.15 28.7,15.25 28.95,15.25 28.95,14.15 28.73,13.62 28.2,13.41 27.67,13.62 27.45,14.15 27.45,15.25 27.7,15.25
GND_POWER on TOP (solid shape): 28.73,16.89 28.95,16.36 28.95,15.25 28.7,15.25 28.7,16.36 28.55,16.71 28.2,16.85 27.85,16.71 27.7,16.36 27.7,15.25 27.45,15.25 27.45,16.36 27.67,16.89 28.2,17.11
Net_3 on BOTTOM (solid shape): 23.4,12.36 22.3,12.36 21.95,12.21 21.8,11.85 21.95,11.5 22.3,11.36 23.4,11.36 23.4,11.1 22.3,11.1 21.77,11.32 21.55,11.85 21.77,12.39 22.3,12.61 23.4,12.61
Net_3 on BOTTOM (solid shape): 24.5,12.61 25.03,12.39 25.25,11.85 25.03,11.32 24.5,11.1 23.4,11.1 23.4,11.36 24.5,11.36 24.85,11.5 25,11.85 24.85,12.21 24.5,12.36 23.4,12.36 23.4,12.61
Net_4 on BOTTOM (solid shape): 27.7,14.15 27.85,13.8 28.2,13.66 28.55,13.8 28.7,14.15 28.7,15.25 28.95,15.25 28.95,14.15 28.73,13.62 28.2,13.41 27.67,13.62 27.45,14.15 27.45,15.25 27.7,15.25
Net_4 on BOTTOM (solid shape): 28.73,16.89 28.95,16.36 28.95,15.25 28.7,15.25 28.7,16.36 28.55,16.71 28.2,16.85 27.85,16.71 27.7,16.36 27.7,15.25 27.45,15.25 27.45,16.36 27.67,16.89 28.2,17.11
Net_5 on BOTTOM (solid shape): 23.4,18.66 22.1,18.66 21.75,18.51 21.6,18.15 21.75,17.8 22.1,17.66 23.4,17.66 23.4,17.41 22.1,17.41 21.57,17.62 21.35,18.15 21.57,18.69 22.1,18.9 23.4,18.9
Net_5 on BOTTOM (solid shape): 24.7,18.9 25.23,18.69 25.45,18.15 25.23,17.62 24.7,17.41 23.4,17.41 23.4,17.66 24.7,17.66 25.05,17.8 25.2,18.15 25.05,18.51 24.7,18.66 23.4,18.66 23.4,18.9
N12978 on TOP (solid shape): 23.4,18.66 22.1,18.66 21.75,18.51 21.6,18.15 21.75,17.8 22.1,17.66 23.4,17.66 23.4,17.41 22.1,17.41 21.57,17.62 21.35,18.15 21.57,18.69 22.1,18.9 23.4,18.9
N12978 on TOP (solid shape): 24.7,18.9 25.23,18.69 25.45,18.15 25.23,17.62 24.7,17.41 23.4,17.41 23.4,17.66 24.7,17.66 25.05,17.8 25.2,18.15 25.05,18.51 24.7,18.66 23.4,18.66 23.4,18.9

## Text on the board
TOP: SatRot | Taking Everyone to Space
